# Altium PCB PCB1.PcbDoc (part 2 of 2)
Units mm, origin at the board's own origin, x right, y up, seen from the top; angles counter-clockwise.
Board outline 100 x 100 mm, 4 copper layers (Top Layer, Layer 1, Layer 2, Bottom Layer), stack 1.55 mm thick; 115 components, 62 nets, 404 pads, 430 vias.
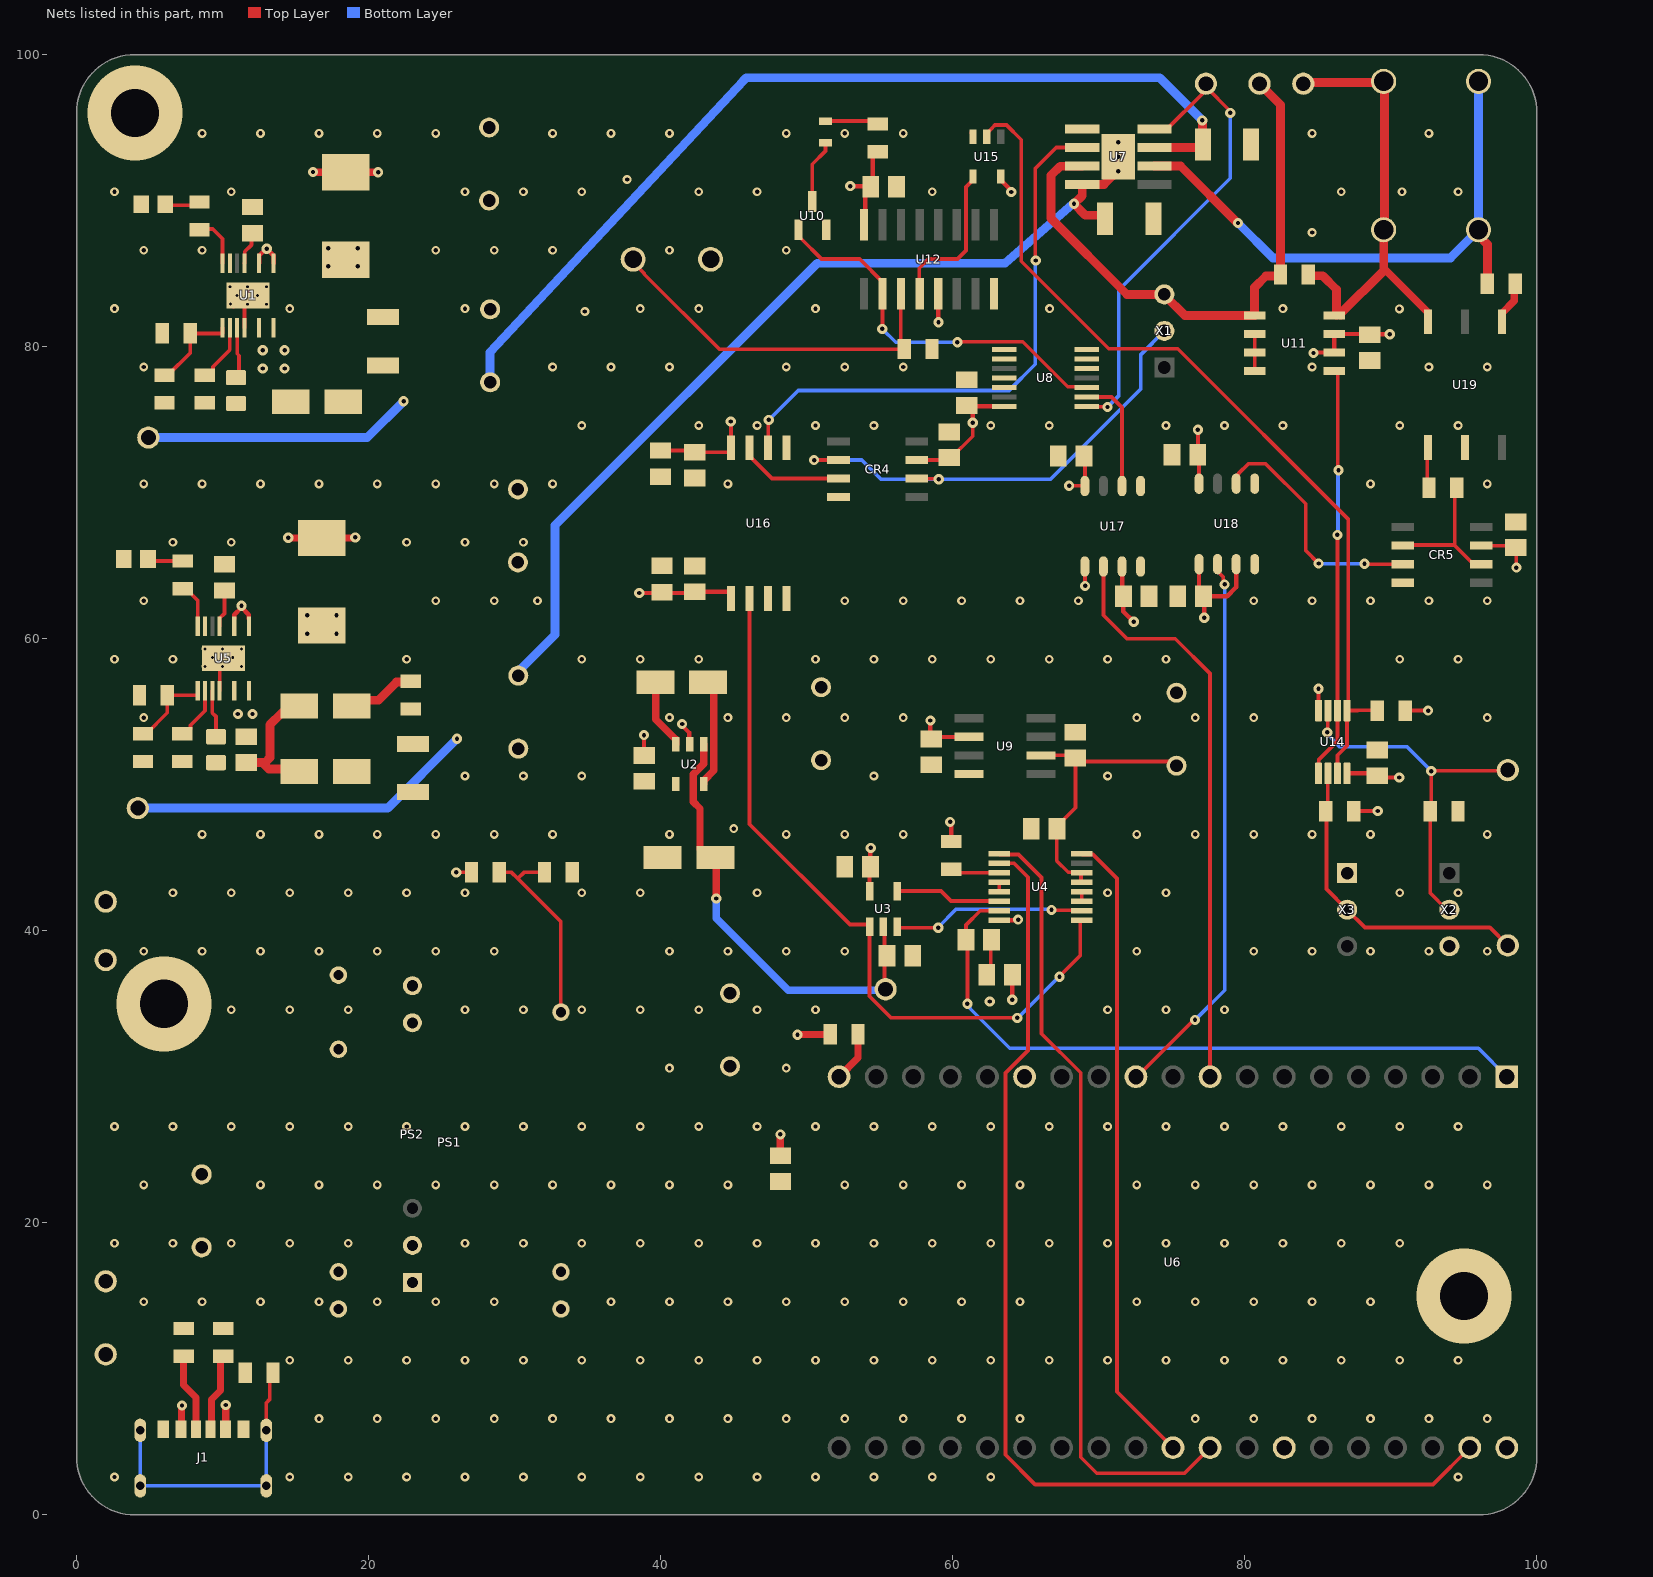
[diagram p4: the nets of this part, all layers, seen from the top]

## Part data
C1 C7 C10 C11 C17 C19 C23 C33: library part 450BXC10MEFC10X20, "No Description Available", Manufacturer_Name=Rubycon, Copyright="Copyright (C) 2026 Ultra Librarian. All rights reserved.", Manufacturer_Part_Number=450BXC10MEFC10X20
C2 C4 J1: Package=None, Availability=Unavailable, Price=None
  C2 C4: MF="{'manufacturer': u'W\xfcrth Elektronik'}", MP=865060640001
  J1: MP=USB4125-GF-A_REVA2
CR1 CR2 CR3: "No Description Available", Manufacturer_Name="SMC Diode Solutions", Copyright="Copyright (C) 2026 Ultra Librarian. All rights reserved.", Manufacturer_Part_Number=SK220ATR
CR4 CR5: "Output rail-to-rail op-amps", Manufacturer_Name=STMicroelectronics, Copyright="Copyright (C) 2026 Ultra Librarian. All rights reserved.", Datasheet=https://www.st.com/resource/en/datasheet/ts461.pdf, Manufacturer_Part_Number=TS461CDT, RefDes=RefDes, Type=Type
D4: "No Description Available", Manufacturer_Name="ROHM Semiconductor", Copyright="Copyright (C) 2026 Ultra Librarian. All rights reserved.", Manufacturer_Part_Number=SML-M13UTT86
PS1: "Power Supply", Manufacturer_Name="XP POWER", Mouser Part Number=209-JHM1005S05, Datasheet Link=https://docs.rs-online.com/50a4/0900766b8150c28f.pdf, Height=13.2mm, Manufacturer_Part_Number=JHM1005S05, Mouser Price/Stock=https://www.mouser.co.uk/ProductDetail/XP-Power/JHM1005S05?qs=w%2Fv1CP2dgqr7tGfLUXFVVQ%3D%3D
PS2: "Power Supply", Manufacturer_Name="XP POWER", Mouser Part Number=209-IMM0505S05, Datasheet Link=https://www.xppower.com/portals/0/pdfs/SF_IMM05.pdf, Height=13mm, Manufacturer_Part_Number=IMM0505S05, Mouser Price/Stock=https://www.mouser.co.uk/ProductDetail/XP-Power/IMM0505S05?qs=0lSvoLzn4L%2FxNlweCwWKNw%3D%3D
R8: library part Resistor, "Resistor", SimulationGenericComponent=True, TC1=0, TC2=0
U1 U5: library part LT8365HMSEPBF, "Low IQ Boost/SEPIC/Inverting Converter with 1.5A, 150V SwitchÂ", Manufacturer_Name="Analog Devices Inc", Copyright="Copyright (C) 2025 Ultra Librarian. All rights reserved.", Manufacturer_Part_Number=LT8365HMSE#PBF, RefDes=RefDes, Type="Power Management"
U2: "Switched-Capacitor Voltage Inverters", Manufacturer_Name="Analog Devices Inc", Copyright="Copyright (C) 2026 Ultra Librarian. All rights reserved.", Manufacturer_Part_Number=MAX870EUK+T, RefDes=RefDes, Type=Type
U3: "Zero-Drift, Single-Supply, Rail-to-Rail Input/Output Operational Amplifier", Manufacturer_Name="Analog Devices Inc", Copyright="Copyright (C) 2025 Ultra Librarian. All rights reserved.", Manufacturer_Part_Number=AD8628ARTZ-REEL7, RefDes=RefDes, Type=Type
U4: "2.7 V to 5.5 V, Serial-Input, Voltage-Output, 16-Bit nanoDACâ„¢ in 10-lead LFCSP, 16-lead 3 mm x 3 mm LFCSP, and 16-lead TSSOP", Manufacturer_Name="Analog Devices Inc", Copyright="Copyright (C) 2026 Ultra Librarian. All rights reserved.", Manufacturer_Part_Number=AD5542ABRUZ, RefDes=RefDes, Type=Type
U6: "The ESP32-DEVKITC-32UE evaluation board from Espressif Systems is designed for seamless wireless connectivity in IoT applications. Powered by the ESP32-WROOM-32UE module, it supports dual-mode BluetoothÂ® Smart Ready 4.x and 802.11 b/g/n Wi-Fi at 2.4GHz.", Package="CUSTOM-38 ESPRESSIF", Check_prices=https://www.snapeda.com/parts/ESP32-DEVKITC-32UE/Espressif+Systems/view-part/?ref=eda, MF="Espressif Systems", MP=ESP32-DEVKITC-32UE, SnapEDA_Link=https://www.snapeda.com/parts/ESP32-DEVKITC-32UE/Espressif+Systems/view-part/?ref=snap
U7: "180-V, wide bandwidth (6.5 MHz), high-slew rate (25 V/Âµs) unity-gain stable op amp 8-SO PowerPAD -40 to 85", Manufacturer_Name="Texas Instruments", Copyright="Copyright (C) 2026 Ultra Librarian. All rights reserved.", Manufacturer_Part_Number=OPA462IDDA, RefDes=RefDes, Type=TYPE
U8: "4-ch, 2-input, 2-V to 6-V 5.2 mA drive strength NOR gate 14-TSSOP -40 to 85", Manufacturer_Name="Texas Instruments", Copyright="Copyright (C) 2026 Ultra Librarian. All rights reserved.", Manufacturer_Part_Number=SN74HC02PWR, RefDes=RefDes, Type=Type
U9: "Ultraprecision, Low Noise, 2.500 V XFETÂ® Voltage References", Manufacturer_Name="Analog Devices Inc", Copyright="Copyright (C) 2026 Ultra Librarian. All rights reserved.", Manufacturer_Part_Number=ADR421ARZ, RefDes=RefDes, Type=Type
U10: "Description", Manufacturer_Name=onsemi, Copyright="Copyright (C) 2026 Ultra Librarian. All rights reserved.", Manufacturer_Part_Number=2N7002KT1G, RefDes=RefDes, Type=Type
U11: "-4 to 80V, bidirectional, ultra-precise current sense amplifier with enhanced PWM rejection 8-SOIC -40 to 125", Manufacturer_Name="Texas Instruments", Copyright="Copyright (C) 2025 Ultra Librarian. All rights reserved.", Manufacturer_Part_Number=INA240A1DR, RefDes=RefDes, Type=Type
U12: "CMOS Quad NOR R/S Latch with 3-State Outputs 16-SOIC -55 to 125", Manufacturer_Name="Texas Instruments", Copyright="Copyright (C) 2025 Ultra Librarian. All rights reserved.", Manufacturer_Part_Number=CD4043BDR, RefDes=RefDes, Type=Type
U13: "No Description Available", Manufacturer_Name="CW Industries", Copyright="Copyright (C) 2026 Ultra Librarian. All rights reserved.", Manufacturer_Part_Number=GPTS203211B, RefDes=RefDes, Type=Type
U14: "Dual high voltage, low power comparator", Package="VSSOP-8 Texas Instruments", Check_prices=https://www.snapeda.com/parts/TLV1702AIDGKR/Texas+Instruments/view-part/?ref=eda, MF="Texas Instruments", MP=TLV1702AIDGKR, SnapEDA_Link=https://www.snapeda.com/parts/TLV1702AIDGKR/Texas+Instruments/view-part/?ref=snap
U15: "Single 2-V to 5.5-V inverter 5-SOT-23 -40 to 125", Manufacturer_Name="Texas Instruments", Copyright="Copyright (C) 2026 Ultra Librarian. All rights reserved.", Manufacturer_Part_Number=SN74AHC1G04DBVR, RefDes=RefDes, Type=Type
U16: "Automotive, &plusmn;5-V input, precision voltage sensing reinforced isolated amplifier 8-SOIC -40 to 125", Manufacturer_Name="Texas Instruments", Copyright="Copyright (C) 2026 Ultra Librarian. All rights reserved.", Manufacturer_Part_Number=AMC1350QDWVRQ1, RefDes=RefDes, Type=Type
U17 U18: "Robust EMC, single-channel, reinforced digital isolator 8-SOIC -55 to 125", Manufacturer_Name="Texas Instruments", Copyright="Copyright (C) 2026 Ultra Librarian. All rights reserved.", Manufacturer_Part_Number=ISO7710FDR, RefDes=RefDes, Type=TYPE
U19: "No Description Available", Manufacturer_Name=Panasonic, Copyright="Copyright (C) 2026 Ultra Librarian. All rights reserved.", Manufacturer_Part_Number=AQV217AZ, RefDes=RefDes, Type=Type
X1 X2 X3: "No Description Available", Manufacturer_Name=Murata, Copyright="Copyright (C) 2026 Ultra Librarian. All rights reserved.", Manufacturer_Part_Number=PV36W102C01B00
C3 C5 C6 C8 C9 C12 C13 C14 C15 C16 C18 C20 C21 C22 C24 C25 C26 C27 C28 C29 C30 C31 C32 C34 C35 C36 C37 C38 C39 C40 C41 C42 C43 C44 L1 L2: SimulationGenericComponent=True
R1 R2 R3 R4 R5 R6 R7 R9 R10 R11 R12 R13 R14 R15 R16 R17 R18 R19 R20 R20_opt R21 R21_opt R22: SimulationGenericComponent=True, TC1=0, TC2=0

## Via types
v1: diameter 0.6, hole 0.3, Top Layer to Bottom Layer, tented both sides, 330 vias
v2: diameter 0.7, hole 0.3, Top Layer to Bottom Layer, tented both sides, 81 vias
v3: diameter 0.45, hole 0.2, Top Layer to Bottom Layer, tented both sides, 16 vias
v4: diameter 6.5, hole 3.3, Top Layer to Bottom Layer, tented both sides, 3 vias

## Nets (pads, with @x,y where several pads share a name; then routed paths per layer and width w, separated by ;. In a path a pad name is that pad's centre, name@x,y a point inside that pad or via, vN(x,y) a via of type N, cw(c..) or ccw(c..) an arc to the next point about the centre after c; other vN are vias at no path point)
+2.5: C10.1 C12.2 C21.2 U4.5 U4.6 U9.6 | length 20.1
  Top Layer w0.254: U9.6@66.042,52.011 68.217,52.011 C21.2@68.397,51.831 ; C12.2@67.122,46.992 67.122,44.788 67.904,44.005 68.789,44.005 U4.6@68.819,43.975 68.775,43.93 68.775,43.37 U4.5@68.819,43.325 ; C12.2@67.13,47 67.13,47.16 68.397,48.427 C21.2@68.397,51.831 ; C10.1@75.318,51.302 75.016,51.302 74.733,51.585 68.642,51.585 C21.2@68.397,51.831
  Bottom Layer w0.254: C10.1@75.113,51.302 C10.1@75.318,51.302
+3.3: C31.2 U4.15 U6.1 | length 47.2
  Top Layer w0.254: v2(61,35) 61,39.282 C31.2@60.899,39.383 60.899,40.4 61.874,41.375 U4.15@63.181,41.375
  Bottom Layer w0.254: v2(61,35) 61,34.879 61.193,34.686 61.193,34.668 63.905,31.956 95.987,31.956 U6.1@97.935,30.008
+5: C9.2 C19.1 C20.2 C22.1 C23.1 C30.2 C33.1 C34.2 C35.2 C36.1 C39.2 C41.2 J1.A9 J1.B9 PS1.22 PS1.23 PS2.1 R5.1 R22.2 TP+5.1 U2.2 U3.5 U4.16 U9.2 U16.1 U17.1 U17.3 U18.1 U18.3 | length 41.4
  Top Layer w0.3: v2(38.531,63.131) C35.2@40.028,63.131 ; v2(38.859,53.399) 38.859,52.026 C22.1@38.887,51.998 ; C35.2@40.085,63.188 C35.2@40.028,63.131 ; v2(41.465,54.163) 41.465,54.055 41.942,53.578 41.942,52.827 U2.2@41.988,52.78 ; C36.1@42.332,63.131 C35.2@40.028,63.131 ; C36.1@42.332,63.209 44.706,63.209 44.812,63.103 U16.1@44.812,62.763 ; U3.5@54.3,42.719 54.3,44.34 C30.2@54.36,44.4 54.36,45.649 v2(54.386,45.674) ; v2(58.466,54.396) 58.466,53.189 C20.2@58.523,53.132 58.658,53.267 U9.2@61.1,53.267 ; v2(59.817,47.458) 59.884,47.392 R5.1@59.884,46.113 ; U4.16@63.181,40.725 64.428,40.725 v2(64.472,40.768) ; v2(64.071,35.272) 64.071,36.991 C9.2@64.08,37 ; U17.1@69.045,64.941 69.052,64.935 69.052,63.622 v2(69.058,63.616) ; U17.3@71.585,64.941 71.614,64.913 71.614,62.973 C39.2@71.679,62.909 71.679,61.863 v2(72.385,61.156) ; U18.1@76.858,65.105 76.858,63.21 C41.2@77.16,62.909 ; v2(77.209,61.439) 77.209,62.859 C41.2@77.16,62.909 ; U18.3@79.398,65.105 79.398,63.52 78.787,62.909 C41.2@77.16,62.909
  Top Layer w0.5: J1.B9@7.16,5.88 7.19,5.91 7.19,7.47 v2(7.22,7.5) ; J1.A9@10.2,5.88 10.212,5.892 10.212,7.524 v2(10.224,7.535) ; v2(48.194,26.059) 48.194,24.605 C34.2@48.203,24.596 ; v2(49.364,32.886) 49.376,32.898 51.595,32.898 R22.2@51.607,32.91
+5_iso: C1.1 C11.1 C26.1 C27.2 C28.2 C29.2 C37.1 C38.2 C40.2 C42.2 C43.2 C44.2 CR4.7 CR5.7 L1.1 L2.1 PS1.14 PS2.9 R13.2 R15.2 R16.2 R20_opt.1 TP+5_iso.1 U1.1 U1.3 U5.1 U5.3 U8.14 U11.6 U11.7 U12.5 U12.16 U13.1 U14.8 U15.5 U16.8 U17.8 U18.8 X2.3 | length 66.2
  Top Layer w0.254: v2(26,44) R20_opt.1@27.047,44 ; C37.1@39.985,72.89 C38.2@42.332,72.89 ; C38.2@42.332,72.772 44.66,72.772 44.66,72.923 U16.8@44.812,73.076 44.812,74.864 v2(44.803,74.874) ; CR4.7@57.535,72.234 59.577,72.234 C43.2@59.741,72.398 59.901,72.398 61.37,73.866 v2(61.37,74.791) ; v2(67.965,70.473) 69.025,70.473 U17.8@69.045,70.453 69.045,72.444 C40.2@68.979,72.51 ; v2(76.784,74.313) 76.784,72.615 C42.2@76.768,72.599 76.858,72.508 U18.8@76.858,70.617 ; U11.7@86.113,80.866 88.497,80.866 C29.2@88.558,80.805 ; R15.2@90.975,55.059 90.994,55.078 v2(92.544,55.078) ; CR5.7@96.172,66.373 98.418,66.373 98.588,66.203 v2(98.588,64.87)
  Top Layer w0.3: U5.3@10.801,61.383 10.801,61.645 11.299,62.143 v2(11.299,62.251) 11.299,62.145 11.8,61.644 U5.1@11.8,61.383 ; U1.3@12.5,85.716 12.5,86.223 12.978,86.701 v2(13.022,86.701) ; v2@13.042,86.681 13.5,86.223 U1.1@13.5,85.716 ; v2(14.503,66.919) v2@14.524,66.897 ; v2(16.191,91.952) v2@16.2,91.943 ; v2@19.056,66.897 v2(19.093,66.934) ; v2@20.648,91.943 v2(20.65,91.941) ; v2(52.981,90.992) 54.256,90.992 C28.2@54.382,91.118 ; U12.16@53.923,88.342 53.997,88.416 53.997,90.573 C28.2@54.382,90.958 ; C28.2@54.524,91.1 54.524,93.028 54.832,93.335 R13.2@54.856,93.335 ; U12.5@59.003,83.617 59.003,81.694 v2(59.023,81.674) ; C26.1@60.925,75.963 60.975,75.912 U8.14@63.512,75.912 ; C26.1@60.968,75.976 60.506,75.976 60.4,75.871 61.05,75.871 61.37,75.551 v2(61.37,74.791) ; U15.5@63.282,91.638 63.282,91.405 64.006,90.682 v2(64.006,90.586) ; v2(84.698,79.561) 84.733,79.596 U11.6@86.113,79.596 U11.7@86.113,80.866 ; U14.8@86.99,50.778 88.914,50.778 89.194,50.498 v2(90.574,50.498) ; R16.2@87.452,48.195 87.463,48.206 v2(89.093,48.206) ; C29.2@88.558,80.805 88.601,80.849 v2(89.911,80.849)
  Top Layer w0.5: v2@14.524,66.897 L2.1@16.8,66.897 v2@19.056,66.897 ; v2@16.2,91.943 L1.1@18.44,91.943 v2@20.648,91.943
+90: C7.1 C8.2 C24.2 CR1.1 R3.2 TP+90.1 U7.7 | length 83.8
  Top Layer w0.6: U7.7@73.809,93.635 U7.7@73.809,93.635 76.794,93.634 77.009,93.849 C24.2@77.12,93.849 77.103,93.866 77.103,95.472 v2(77.086,95.489)
  Bottom Layer w0.6: TP+90.1@4.921,73.772 19.908,73.772 v2(22.398,76.261) ; C7.1@28.324,77.556 28.307,78.047 28.307,79.607 45.676,98.23 45.683,98.237 45.859,98.413 74.169,98.413 74.345,98.237 77.086,95.496 v2(77.086,95.489)
-5: C2.2 C32.2 TP-5.1 U2.1 U3.2 | length 31
  Top Layer w0.254: U3.2@55.25,40.281 55.325,40.206 55.325,36.075 TP-5.1@55.4,36
  Top Layer w0.508: U2.1@42.938,52.78 42.938,51.435 42.23,50.727 42.23,48.832 42.69,48.372 42.69,45.566 43.236,45.02 C2.2@43.736,45.02 ; C2.2@43.721,44.862 43.807,44.776 v2(43.807,42.21)
  Bottom Layer w0.508: v2(43.807,42.21) 43.807,40.853 48.736,35.923 55.323,35.923 TP-5.1@55.4,36
-90: C17.2 C18.2 C25.1 R8.1 R9.2 TP-90.1 U7.4 U7.9 | length 87.3
  Top Layer w0.6: C25.1@70.202,89 69.074,89 v2(68.299,89.775) 68.856,90.332 U7.4@68.856,91.095 68.867,91.106 70.357,91.106 70.932,91.681 70.932,91.75 71.182,92 v2(71.332,92) v2(71.332,93)
  Bottom Layer w0.6: TP-90.1@4.2,48.4 21.3,48.4 v2(26.05,53.15) ; C17.2@30.25,57.473 30.25,57.75 32.762,60.262 32.762,67.762 50.712,85.712 63.571,85.712 68.217,89.775 68.294,89.775 v2(68.299,89.775)
  other v2: 71.332,94
CLK: U4.9 U6.28 | length 54.4
  Top Layer w0.254: U4.9@63.181,45.275 63.231,45.224 64.5,45.224 66.078,43.646 66.078,32.951 68.753,30.276 68.753,3.956 69.849,2.86 75.867,2.86 U6.28@77.615,4.608
CS: U4.8 U6.29 | length 43.7
  Top Layer w0.254: U4.8@68.819,45.275 68.87,45.224 69.597,45.224 71.239,43.582 71.239,8.444 U6.29@75.075,4.608
DIN: U4.10 U6.21 | length 76.2
  Top Layer w0.254: U4.10@63.181,44.625 64.189,44.625 65.149,43.666 65.149,31.808 63.609,30.268 63.609,4.119 65.637,2.091 92.877,2.091 U6.21@95.395,4.608
"Electrode +": Post2.1 R21.1 U7.6 | length 39.6
  Top Layer w0.6: U7.6@73.809,92.365 75.596,92.365 v2@79.479,88.481 ; Post2.1@96,88 96,87.603 96.605,86.998 R21.1@96.605,84.313
  Bottom Layer w0.6: v2(79.526,88.462) 81.916,86.073 94.073,86.073 95.983,87.983 Post2.1@95.983,88 ; Post2.1@96,88 Post2.1@96,98.16
"Electrode -": E1_iso.1 R11.1 U7.3 U11.1 X1.3 | length 39.8
  Top Layer w0.6: U7.3@68.843,92.354 67.354,92.354 66.716,91.716 66.716,88.789 71.933,83.572 X1.3@74.485,83.572 74.485,83.531 75.88,82.136 U11.1@80.67,82.136 ; U11.1@80.666,82.136 80.666,84.058 81.442,84.835 82.335,84.835 R11.1@82.439,84.939 82.439,96.561 E1_iso.1@81,98
Electrode_charge_balancing: CR5.2 CR5.6 R20.2 | length 9.9
  Top Layer w0.254: CR5.2@90.812,66.373 90.858,66.419 94.346,66.419 ; 94.336,66.419 95.5,65.255 96.019,65.255 CR5.6@96.172,65.103 ; 94.374,66.391 94.374,70.208 R20.2@94.512,70.345
EN_OPA: U6.9 U17.2 | length 39.9
  Top Layer w0.254: U17.2@70.315,64.941 70.315,61.612 71.928,60 75.227,60 77.615,57.613 U6.9@77.615,30.008
EN_OPA2: U8.3 U10.1 U12.2 | length 26.4
  Top Layer w0.254: U10.1@49.427,88 49.427,87.568 49.58,87.416 49.593,87.416 51.009,86 53.623,86 55.193,84.43 U12.2@55.193,83.617 55.18,83.603 55.18,81.227 v2(55.166,81.213) ; v2(60.313,80.292) 60.348,80.328 64.797,80.328 67.871,77.254 68.985,77.254 U8.3@69.086,77.152
  Bottom Layer w0.254: v2(55.166,81.213) 56.087,80.292 v2(60.313,80.292)
EN_OPA_iso: U8.2 U17.6 | length 8.1
  Top Layer w0.254: U8.2@69.159,76.553 70.866,76.553 71.585,75.834 U17.6@71.585,70.453
Esp32_charge_balancing: U6.11 U18.2 | length 37.9
  Top Layer w0.254: U6.11@72.535,30.008 72.616,30.008 76.506,33.898 v2(76.587,33.898) ; U18.2@78.128,65.105 78.128,64.613 78.523,64.218 78.523,63.806 v2(78.608,63.72)
  Bottom Layer w0.254: v2(76.587,33.898) 78.615,35.926 78.615,63.714 v2(78.608,63.72)
GND: C2.1 C9.1 C10.2 C12.1 C19.2 C20.1 C21.1 C22.2 C23.2 C30.1 C31.1 C32.1 C33.2 C34.1 C35.1 C36.2 C39.1 C41.1 J1.A12 J1.B12 PS1.2 PS1.3 PS2.2 R12.2 R18.1 R19.1 TP_gnd.1 U2.4 U4.3 U4.4 U4.12 U4.13 U6.14 U6.20 U6.26 U9.4 U16.3 U16.4 U17.4 U18.4 | length 4.9
  Top Layer w0.254: J1.B12@5.93,5.88 J1.B12@6,5.95 ; J1.A12@11.43,5.88 J1.A12@11.5,5.95 ; R12.2@11.5,9.703 R12.2@11.548,9.75 ; C2.1@40.188,45.072 C2.1@40.236,45.12 ; C9.1@62.32,37 62.602,37.282 62.602,39.327 C31.1@62.659,39.383 ; U4.13@62.571,42.677 62.573,42.675 U4.13@63.181,42.675 U4.12@63.181,43.325 ; C12.1@65.363,46.993 C12.1@65.37,47 ; C21.1@68.397,53.591 C21.1@68.442,53.546 ; U4.3@68.819,42.025 U4.4@68.819,42.675
  Top Layer w0.508: C22.2@38.885,50.236 C22.2@38.904,50.217
  other v1: 2.6,2.6 14.6,2.6 18.6,2.6 22.6,2.6 26.6,2.6 30.6,2.6 34.6,2.6 38.6,2.6 42.6,2.6 46.6,2.6 50.6,2.6 54.6,2.6 58.6,2.6 62.6,2.6 94.6,2.6 16.6,6.6 20.6,6.6 24.6,6.6 28.6,6.6 32.6,6.6 36.6,6.6 40.6,6.6 44.6,6.6 48.6,6.6 52.6,6.6 56.6,6.6 60.6,6.6 64.6,6.6 76.6,6.6 80.6,6.6 84.6,6.6 88.6,6.6 92.6,6.6 96.6,6.6 14.6,10.6 18.6,10.6 22.6,10.6 26.6,10.6 30.6,10.6 34.6,10.6 38.6,10.6 42.6,10.6 46.6,10.6 50.6,10.6 54.6,10.6 58.6,10.6 62.6,10.6 66.6,10.6 70.6,10.6 74.6,10.6 78.6,10.6 82.6,10.6 86.6,10.6 90.6,10.6 94.6,10.6 4.6,14.6 8.6,14.6 12.6,14.6 16.6,14.6 20.6,14.6 24.6,14.6 28.6,14.6 36.6,14.6 40.6,14.6 44.6,14.6 48.6,14.6 52.6,14.6 56.6,14.6 60.6,14.6 64.6,14.6 72.6,14.6 76.6,14.6 80.6,14.6 84.6,14.6 88.6,14.6 2.6,18.6 6.6,18.6 10.6,18.6 14.6,18.6 18.6,18.6 26.6,18.6 30.6,18.6 34.6,18.6 38.6,18.6 42.6,18.6 46.6,18.6 50.6,18.6 54.6,18.6 58.6,18.6 62.6,18.6 66.6,18.6 70.6,18.6 74.6,18.6 78.6,18.6 82.6,18.6 86.6,18.6 90.6,18.6 4.6,22.6 12.6,22.6 16.6,22.6 20.6,22.6 24.6,22.6 28.6,22.6 32.6,22.6 36.6,22.6 40.6,22.6 44.6,22.6 52.6,22.6 56.6,22.6 60.6,22.6 64.6,22.6 72.6,22.6 76.6,22.6 80.6,22.6 84.6,22.6 88.6,22.6 92.6,22.6 96.6,22.6 2.6,26.6 6.6,26.6 10.6,26.6 14.6,26.6 18.6,26.6 22.6,26.6 26.6,26.6 30.6,26.6 34.6,26.6 38.6,26.6 42.6,26.6 46.6,26.6 50.6,26.6 54.6,26.6 58.6,26.6 62.6,26.6 66.6,26.6 70.6,26.6 74.6,26.6 78.6,26.6 82.6,26.6 86.6,26.6 90.6,26.6 94.6,26.6 40.6,30.6 48.6,30.6 38.6,34.6 42.6,34.6 46.6,34.6 50.6,34.6 70.6,34.6 74.6,34.6 78.6,34.6 40.6,38.6 44.6,38.6 48.6,38.6 52.6,38.6 72.6,38.6 80.6,38.6 38.6,42.6 46.6,42.6 70.6,42.6 74.6,42.6 40.6,46.6 48.6,46.6 52.6,46.6 56.6,46.6 72.6,46.6 76.6,46.6 80.6,46.6 45,47 54.6,50.6 70.6,50.6 40.603,54.603 44.6,54.6 48.6,54.6 52.6,54.6 56.6,54.6 72.6,54.6 76.6,54.6 80.6,54.6 38.6,58.6 42.6,58.6 50.6,58.6 54.6,58.6 58.6,58.6 62.6,58.6 66.6,58.6 70.6,58.6 74.6,58.6 52.6,62.6 56.6,62.6 60.6,62.6 64.6,62.6 68.6,62.6 80.6,62.6
  other v2: 62.535,35.16
  other v4: 95,15
GND_iso: C1.2 C3.2 C5.1 C6.1 C7.2 C8.1 C11.2 C13.2 C14.1 C15.1 C17.1 C18.1 C24.1 C25.2 C26.2 C27.1 C28.1 C29.1 C37.2 C38.1 C40.1 C42.1 C43.1 C44.1 CR3.1 CR4.4 CR5.4 PS1.16 PS2.8 R2.1 R4.2 R7.1 R10.2 R14.2 R17.1 R21_opt.2 TP_gnd_iso.1 U1.7 U1.12 U1.17 U5.7 U5.12 U5.17 U7.1 U8.5 U8.6 U8.7 U8.8 U8.9 U8.11 U8.12 U10.2 U11.2 U11.3 U11.4 U12.8 U14.4 U15.3 U16.5 U17.5 U18.5 U19.2 X3.1 | length 10.5
  Top Layer w0.254: U5.12@9.8,56.434 U5.17@9.8,58.4 ; U1.17@10.75,82.751 10.899,82.9 U1.17@11.5,82.9 ; U1.12@11.5,81.284 U1.17@11.5,82.9 ; U1.17@11.75,83.5 11.5,83.25 U1.17@11.5,83.1 ; C28.1@56.142,90.958 C28.1@56.29,90.81 ; R14.2@58.578,79.834 R14.2@58.625,79.787 ; U15.3@61.255,94.665 61.382,94.538 U15.3@61.382,94.362 ; U12.8@62.764,83.568 U12.8@62.813,83.617 ; U11.4@80.67,78.326 U11.3@80.67,79.596 U11.2@80.67,80.866 ; v2(85.038,56.576) 85.039,56.575 85.039,55.079 U14.4@85.04,55.078 ; C27.1@89.074,52.378 C27.1@89.194,52.498 ; U1.17@11.5,82.9 U1.17@11.5,83.1 ; U1.17@11.5,82.9 v3(11.7,82.9) U1.17@11.5,83.1
  other v1: 10.6,34.6 14.6,34.6 18.6,34.6 26.6,34.6 30.6,34.6 34.6,34.6 4.6,38.6 8.6,38.6 12.6,38.6 16.6,38.6 20.6,38.6 24.6,38.6 28.6,38.6 84.6,38.6 88.6,38.6 92.6,38.6 96.6,38.6 6.6,42.6 10.6,42.6 14.6,42.6 18.6,42.6 22.6,42.6 26.6,42.6 34.6,42.6 90.6,42.6 94.6,42.6 8.6,46.6 12.6,46.6 16.6,46.6 20.6,46.6 24.6,46.6 28.6,46.6 32.6,46.6 84.6,46.6 88.6,46.6 96.6,46.6 26.6,50.6 30.6,50.6 34.6,50.6 4.6,54.6 96.6,54.6 2.6,58.6 6.6,58.6 22.6,58.6 34.6,58.6 90.6,58.6 94.6,58.6 4.6,62.6 24.6,62.6 28.6,62.6 31.562,62.6 84.6,62.6 88.6,62.6 92.6,62.6 96.6,62.6 6.6,66.6 10.6,66.6 22.6,66.6 26.6,66.6 30.6,66.6 4.6,70.6 8.6,70.6 12.6,70.6 16.6,70.6 20.6,70.6 24.6,70.6 28.6,70.6 32.6,70.6 44.6,70.6 88.6,70.6 96.6,70.6 34.6,74.6 42.6,74.6 46.6,74.6 50.6,74.6 54.6,74.6 62.6,74.6 66.6,74.6 74.6,74.6 78.6,74.6 82.6,74.6 90.6,74.6 94.6,74.6 4.6,78.6 32.6,78.6 36.6,78.6 40.6,78.6 48.6,78.6 52.6,78.6 56.6,78.6 84.6,78.6 92.6,78.6 96.6,78.6 34.811,82.404 90.581,82.581 2.6,82.6 14.6,82.6 26.6,82.6 38.6,82.6 42.6,82.6 50.6,82.6 66.627,82.6 82.6,82.6 4.6,86.6 8.6,86.6 24.6,86.6 28.6,86.6 32.6,86.6 40.6,86.6 48.6,86.6 84.6,87.811 2.6,90.6 10.6,90.6 26.6,90.6 30.6,90.6 34.6,90.6 42.6,90.6 46.6,90.6 58.6,90.6 86.6,90.6 90.759,90.6 94.6,90.6 37.701,91.439 8.6,94.6 12.6,94.6 16.6,94.6 20.6,94.6 24.6,94.6 32.6,94.6 36.6,94.6 40.6,94.6 48.6,94.6 52.6,94.6 56.6,94.6 84.6,94.6 92.6,94.6
  other v3: 8.8,58.1 10,58.1 11.3,58.1 9.3,58.7 10.7,58.7 8.8,59.3 10,59.3 11.3,59.3 13,82.9 10.536,82.922 11,83.5 12.4,83.5 10.5,84.1 11.7,84.1 13,84.1
  other v4: 6,35 4,96
INV: U3.4 U4.14 | length 7.2
  Top Layer w0.254: U3.4@56.2,42.719 59.191,42.719 59.868,42.042 U4.14@63.164,42.042
NetC3_1: C3.1 U1.5 | length 2.3
  Top Layer w0.254: U1.5@11.5,85.716 11.513,85.729 11.513,86.502 11.976,86.965 11.976,87.67 C3.1@12.062,87.756
NetC4_1: C4.1 U2.5 | length 7.4
  Top Layer w0.508: U2.5@42.938,50.05 42.938,50.285 43.646,50.993 43.646,56.63 C4.1@43.247,57.028
NetC4_2: C4.2 U2.3 | length 4.8
  Top Layer w0.508: C4.2@39.647,57.028 39.647,54.492 41.038,53.101 U2.3@41.038,52.78
NetC5_2: C5.2 U1.11 | length 3.5
  Top Layer w0.254: C5.2@10.922,77.88 11.126,78.084 11.126,79.378 11,79.503 U1.11@11,81.284
NetC6_2: C6.2 R1.1 | length 2.5
  Top Layer w0.254: C6.2@6.075,89.75 6.156,89.67 8.193,89.67 R1.1@8.422,89.899
NetC13_1: C13.1 U5.5 | length 2.6
  Top Layer w0.254: U5.5@9.8,60.866 9.8,61.393 10.13,61.723 C13.1@10.13,63.305
NetC14_2: C14.2 U5.11 | length 3.2
  Top Layer w0.254: U5.11@9.3,56.434 9.3,54.921 9.55,54.671 C14.2@9.55,53.288
NetC15_2: C15.2 R6.1 | length 2.4
  Top Layer w0.254: C15.2@4.894,65.449 5.022,65.321 R6.1@7.267,65.321
NetC16_1: C16.1 CR2.1 CR3.2 | length 9.4
  Top Layer w0.6: C16.1@11.607,51.526 12.922,51.526 ; CR3.2@15.247,50.9 15.071,51.076 13.164,51.076 12.818,51.422 12.922,51.526 ; CR2.1@15.247,55.4 14.797,54.95 14.081,54.95 13.242,54.111 13.242,51.846 12.922,51.526
NetC16_2: C16.2 L2.2 U5.14 U5.16
  other v2: 11.051,54.848 12.051,54.848 15.801,60.348 17.801,60.348 15.801,61.598 17.801,61.598
NetCR1_2: CR1.2 L1.2 U1.14 U1.16
  other v2: 12.75,78.5 14.25,78.5 12.75,79.75 14.25,79.75 17.25,85.5 19.25,85.5 17.25,86.742 19.25,86.742
NetCR2_2: CR2.2 R9.1 | length 4.7
  Top Layer w0.6: CR2.2@18.853,55.4 19.24,55.786 20.673,55.786 21.919,57.032 22.778,57.032 R9.1@22.859,57.113
NetCR4_3: CR4.3 U16.7 | length 7.3
  Top Layer w0.254: U16.7@46.082,73.076 46.082,72.504 47.623,70.964 CR4.3@52.176,70.964
NetCR5_3: CR5.3 U18.6 | length 17
  Top Layer w0.254: U18.6@79.398,70.617 79.398,71.109 79.566,71.277 79.566,71.303 80.233,71.971 81.425,71.971 84.161,69.234 84.161,66.038 v2(85.048,65.152) ; v2(88.193,65.129) 88.219,65.103 CR5.3@90.812,65.103
  Bottom Layer w0.254: v2(85.048,65.152) 85.059,65.14 88.181,65.14 v2(88.193,65.129)
NetD4_1: D4.1 U10.3 | length 4.4
  Top Layer w0.254: U10.3@50.375,89.935 50.375,92.484 51.281,93.39 D4.1@51.281,93.945
NetD4_2: D4.2 R13.1 | length 3.7
  Top Layer w0.254: D4.2@51.281,95.443 54.653,95.443 R13.1@54.856,95.24
NetE2_iso_1: E2_iso.1 Post1.1 R11.2 U11.8 U19.6 | length 31.9
  Top Layer w0.5: 89.5,85.358 92.516,82.342 92.516,81.721 U19.6@92.533,81.704
  Top Layer w0.6: E2_iso.1@84,98 84.08,98.08 89.42,98.08 Post1.1@89.5,98.16 89.559,98.101 89.559,88.059 Post1.1@89.5,88 89.5,85.358 89.5,85.203 86.54,82.243 U11.8@86.54,82.157 ; R11.2@84.344,84.939 84.433,84.849 85.33,84.849 86.268,83.911 U11.8@86.268,82.157
NetEN_1: EN.1 U7.8 U8.1 | length 32.8
  Top Layer w0.254: U8.1@69.159,75.903 69.178,75.885 70.577,75.885 v2(70.595,75.867) ; U7.8@73.809,94.905 74.674,94.905 77.089,97.32 77.089,97.757 EN.1@77.332,98 77.332,97.788 79,96.121 v2(79,96)
  Bottom Layer w0.254: v2(70.595,75.867) 71.372,76.643 71.372,83.895 79,91.524 v2(79,96)
NetJ1_A5: J1.A5 R18.2 | length 5.3
  Top Layer w0.5: R18.2@7.325,10.832 7.325,8.902 8.18,8.047 J1.A5@8.18,5.88
NetJ1_B5: J1.B5 R19.2 | length 5.3
  Top Layer w0.5: J1.B5@9.18,5.88 9.239,5.939 9.239,7.913 9.854,8.528 9.854,10.657 R19.2@10.058,10.862
NetJ1_S1: J1.S1 J1.S2 J1.S3 J1.S4 R12.1 | length 20.4
  Top Layer w0.254: J1.S2@13,5.8 13,7.679 13.224,7.902 13.224,9.521 R12.1@13.453,9.75
  Bottom Layer w0.254: J1.S1@4.36,5.8 J1.S3@4.36,2 J1.S4@13,2 J1.S2@13,5.8
NetR1_2: R1.2 U1.8 | length 3.5
  Top Layer w0.254: R1.2@8.422,87.994 8.476,88.047 9.33,88.047 10,87.377 U1.8@10,85.716
NetR2_2: R2.2 U1.10 | length 4.1
  Top Layer w0.254: R2.2@8.774,78.05 9.015,78.05 9.345,78.38 9.345,78.621 10.5,79.776 U1.10@10.5,81.284
NetR3_1: R3.1 R4.1 U1.9 | length 6.3
  Top Layer w0.254: R3.1@6.028,78.05 6.269,78.05 7.782,79.563 R4.1@7.782,80.903 9.987,80.903 10,80.916 U1.9@10,81.284
NetR5_2: R5.2 U4.11 | length 3.4
  Top Layer w0.254: R5.2@59.884,44.208 60.116,43.975 U4.11@63.181,43.975
NetR6_2: R6.2 U5.8 | length 3.1
  Top Layer w0.254: R6.2@7.267,63.416 7.508,63.416 8.3,62.624 U5.8@8.3,60.866
NetR7_2: R7.2 U5.10 | length 3.7
  Top Layer w0.254: R7.2@7.236,53.498 7.477,53.498 7.807,53.829 7.807,54.07 8.8,55.063 U5.10@8.8,56.434
NetR8_2: R8.2 R10.1 U5.9 | length 5.8
  Top Layer w0.254: R8.2@4.551,53.498 4.792,53.498 6.219,54.926 R10.1@6.219,56.135 8.287,56.135 8.3,56.148 U5.9@8.3,56.434
NetR14_1: R14.1 U12.3 U13.6 | length 25.2
  Top Layer w0.254: U13.6@38.114,85.979 38.114,85.765 38.878,85.001 38.878,84.955 44.02,79.813 56.651,79.813 R14.1@56.673,79.834 56.427,80.08 56.427,83.581 U12.3@56.463,83.617
NetR15_1: R15.1 U14.1 U14.7 U15.2 | length 61
  Top Layer w0.254: U15.2@62.332,94.362 62.332,94.595 62.701,94.964 62.701,94.984 62.893,95.176 63.672,95.176 64.683,94.165 64.683,85.841 70.676,79.847 75.4,79.847 87.086,68.161 87.086,55.174 U14.1@86.999,55.087 ; U14.7@86.34,50.778 86.34,52.023 86.99,52.673 U14.1@86.99,54.53 ; U14.1@86.99,54.643 U14.1@86.99,55.078 U14.1@86.999,55.087 ; R15.1@89.07,55.059 89.03,55.098 87.726,55.098 87.714,55.087 U14.1@86.999,55.087
NetR20_1: R20.1 U19.1 | length 2.8
  Top Layer w0.254: U19.1@92.533,73.094 92.496,73.056 92.496,70.457 R20.1@92.607,70.345
NetR21_2: R21.2 U19.4 | length 3
  Top Layer w0.5: U19.4@97.613,81.704 97.613,82.305 98.451,83.143 98.451,84.254 R21.2@98.51,84.313
NetR22_1: R22.1 U6.19 | length 3.4
  Top Layer w0.5: U6.19@52.215,30.008 53.512,31.305 R22.1@53.512,32.91
NetU3_3: U3.3 U4.2 | length 13.2
  Top Layer w0.254: U3.3@56.2,40.281 56.269,40.212 v2(59.002,40.212) ; v2(66.755,41.428) 66.781,41.402 68.793,41.402 U4.2@68.819,41.375
  Bottom Layer w0.254: v2(59.002,40.212) 59.002,40.248 60.225,41.471 66.712,41.471 v2(66.755,41.428)
NetU11_5: U11.5 U14.2 U14.5 | length 28.4
  Top Layer w0.254: U14.5@84.938,50.676 U14.5@85.04,50.778 85.066,50.804 85.066,51.723 86.34,52.998 U14.2@86.34,55.078 86.336,55.082 86.336,67.105 v2(86.332,67.109) ; U11.5@86.113,78.326 86.212,78.326 86.364,78.174 86.364,71.569 v2(86.406,71.528)
  Bottom Layer w0.254: v2(86.332,67.109) 86.369,67.146 86.369,71.49 v2(86.406,71.528)
NetU12_4: U12.4 U15.4 | length 10.7
  Top Layer w0.254: U12.4@57.733,83.617 57.697,83.653 57.697,85.365 58.332,86 60.325,86 60.91,86.585 60.91,90.933 61.382,91.405 U15.4@61.382,91.638
S1: U3.1 U4.1 U16.2 | length 50.7
  Top Layer w0.254: U16.2@46.082,62.763 46.082,47.298 52.954,40.426 54.249,40.426 54.3,40.376 54.3,35.521 55.784,34.037 v2(64.408,34.037) ; v2(67.303,36.858) 67.303,36.887 68.736,38.32 68.736,40.674 68.769,40.674 U4.1@68.819,40.725
  Bottom Layer w0.254: v2(64.408,34.037) 64.442,34.037 67.263,36.858 v2(67.303,36.858)
S1_iso+: CR4.2 CR4.6 X1.2 | length 33.3
  Top Layer w0.254: v2(50.503,72.23) 50.506,72.234 CR4.2@52.176,72.234 ; CR4.6@57.535,70.964 57.556,70.944 59.018,70.944 v2(59.038,70.923)
  Bottom Layer w0.254: v2(50.503,72.23) 53.77,72.23 55.077,70.923 66.693,70.923 72.878,77.108 72.878,79.465 X1.2@74.485,81.072
S1_iso-: U7.2 U16.6 | length 39
  Top Layer w0.254: U16.6@47.352,73.076 47.372,73.095 47.372,74.96 v2(47.391,74.979) ; v2(65.683,85.899) 65.646,85.936 65.646,92.193 67.088,93.635 U7.2@68.856,93.635
  Bottom Layer w0.254: v2(47.391,74.979) 49.412,77 63.85,77 65.641,78.791 65.641,85.857 v2(65.683,85.899)
TRIM: PS1.10 R20_opt.2 R21_opt.1 | length 13.8
  Top Layer w0.254: R20_opt.2@28.952,44 29.791,44 30.215,43.576 30.64,44 R21_opt.1@32.048,44 ; 30.219,43.58 33.157,40.642 PS1.10@33.157,34.443
V_th+: R17.2 U14.3 V_th+.1 X2.2 | length 25.4
  Top Layer w0.254: v2(85.637,53.583) 85.663,53.61 85.663,55.051 U14.3@85.69,55.078 ; R17.2@92.686,48.195 92.686,42.58 93.821,41.445 X2.2@94.124,41.445 ; R17.2@92.687,48.195 92.757,48.265 v2(92.757,50.933) 92.791,50.967 97.967,50.967 V_th+.1@98,51
  Bottom Layer w0.254: v2(85.637,53.583) 85.637,53.474 86.099,53.012 86.099,52.988 86.475,52.612 91.079,52.612 v2(92.757,50.933)
V_th-: R16.1 U14.6 V_th-.1 X3.2 | length 22
  Top Layer w0.254: U14.6@85.69,50.778 85.668,50.756 85.668,48.229 85.591,48.152 85.591,42.854 X3.2@87,41.445 88.218,40.227 96.773,40.227 V_th-.1@98,39
pads on no net: CR4.1 CR4.5 CR4.8 CR5.1 CR5.5 CR5.8 PS2.3 U1.6 U4.7 U5.6 U6.2 U6.3 U6.4 U6.5 U6.6 U6.7 U6.8 U6.10 U6.12 U6.13 U6.15 U6.16 U6.17 U6.18 U6.22 U6.23 U6.24 U6.25 U6.27 U6.30 U6.31 U6.32 U6.33 U6.34 U6.35 U6.36 U6.37 U6.38 U7.5 U8.4 U8.10 U8.13 U9.1 U9.3 U9.5 U9.7 U9.8 U12.1 U12.6 U12.7 U12.9 U12.10 U12.11 U12.12 U12.13 U12.14 U12.15 U15.1 U17.7 U18.7 U19.3 U19.5 X1.1 X2.1 X3.3

## Polygon pours and split planes (outlines as drawn)
GND on Bottom Layer "NONET_L04_P018" (solid, shelved, pour order 18): 38,28 0,28 0,4 4,0 96,0 100,4 100,32 81,32 81,66 38,66
GND_iso on Bottom Layer "NONET_L-01_P-001" (solid, shelved, pour order 21): 0,96 0,31 35,31 35,69 84,69 84,35 100,35 100,96 96,100 4,100
-90 on Bottom Layer "NONET_L04_P007" (solid, shelved, pour order 7): 61,98 61,87 81,87 81,98
NetC16_2 on Bottom Layer "NONET_L04_P005" (solid, shelved, pour order 5): 15.3,62.4 15.3,56.782 13.937,55.741 15.3,55.741 10.3,55.741 10.3,53.914 18.8,53.914 18.8,58.9 18.8,62.4
NetCR1_2 on Bottom Layer "NONET_L04_P006" (solid, shelved, pour order 6): 16.75,87.5 16.75,81.673 15.245,80.487 12,80.487 12,77.5 14.5,77.5 20,77.5 20,83 20,87.5
GND on Top Layer "NONET_L01_P019" (solid, shelved, pour order 19): 0,28 0,4 4,0 96,0 100,4 100,32 80.929,32 80.929,66 38,66 38,28
GND_iso on Top Layer "NONET_L-01_P-001" (solid, shelved, pour order 24): -0.042,31 34.958,31 34.958,69 84,69 84,68.792 84,69 84,35 99.958,35 99.958,96 95.958,100 3.958,100 -0.042,96
GND_iso on Top Layer "NONET_L01_P008" (solid, shelved, pour order 8): 11.3,68.65 0.8,68.65 0.8,44.15 25.35,44.15 33.3,52.1 33.3,54 30.15,54 27.05,50.9 21.05,50.9 20.8,51.15 17.05,51.15 10.05,51.15 10.05,51.9 6.8,51.9 6.8,45.65 1.55,45.65 1.55,52.4 5.05,52.4 5.05,57.4 11.55,57.4 11.55,59.9 11.3,59.9 11.3,64.15
-90 on Top Layer "NONET_L01_P009" (solid, shelved, pour order 9): 2.3,52.15 6.05,52.15 6.05,46.4 2.3,46.4
NetC16_2 on Top Layer "NONET_L01_P016" (solid, shelved, pour order 16): 10.55,57.1 10.55,52.393 12.793,52.393 12.8,52.4 12.791,52.409 12.791,57.107
-90 on Top Layer "NONET_L01_P017" (solid, shelved, pour order 17): 21.3,55.9 24.476,55.9 26.8,59.4 33.3,59.4 33.3,54.5 30.081,54.5 27.261,51.65 21.3,51.65
GND_iso on Top Layer "NONET_L01_P011" (solid, shelved, pour order 11): 12.975,89 12.975,92 1.75,92 1.75,69.5 11.75,69.5 11.75,76.5 7.25,76.5 7.25,73.5 6.75,73.5 6.75,79.5 6.75,81.5 6.75,82.5 14.25,82.5 14.25,81 30.25,81 30.25,84.5 15.25,84.5 12.975,84.5
NetCR1_2 on Top Layer "NONET_L01_P015" (solid, shelved, pour order 15): 12.25,82 12.25,74.5 14.75,74.5 14.75,82
+90 on Top Layer "NONET_L01_P012" (solid, shelved, pour order 12): 29.75,80 29.75,74 16.75,74 16.75,80
+90 on Top Layer "NONET_L01_P010" (solid, shelved, pour order 10): 6.75,76.5 6.75,72.5 3.25,72.5 3.25,76.5
GND on Layer 1 "NONET_L02_P000" (solid, shelved, pour order 0): 81,32 81,66 38,66 38,28 0,28 0,4 4,0 96,0 100,4 100,32
GND_iso on Layer 1 "NONET_L-01_P-001" (solid, shelved, pour order 23): 0,31 35,31 35,69 84,69 84,35 100,35 100,96 96,100 4,100 0,96
+5 on Layer 2 "NONET_L03_P020" (solid, shelved, pour order 20): 81,31.984 81,66 38,66 38,28 0,28 0,4 4,0 96,0 100,4 100,31.984
+5_iso on Layer 2 "NONET_L-01_P-001" (solid, shelved, pour order 22): 0,31 35,31 35,69 84,69 84,35 100,35 100,96 96,100 4,100 0,96

## Keep-outs
Keep-Out Layer:
  the board outline again, w0.254

## Other copper
Top Layer:
  pour cut-out: 7.706,55.933 7.693,55.92 6.75,55.92 6.75,55.41 6.763,55.396 6.685,55.318 6.436,55.318 6.436,54.807 5.363,53.734 5.363,52.687 5.35,52.674 5.494,52.53 6.436,52.53 6.436,53.956 6.528,54.048 7.562,54.048 7.562,54.14 8.583,55.161 8.517,55.226 8.517,55.619 8.151,55.619 8.072,55.698 8.072,55.881
  pour cut-out: 8.974,54.892 8.909,54.892 8.015,53.998 8.015,51.991 8.767,51.991 8.963,52.187 10.294,52.187 10.294,52.569 10.403,52.678 10.403,54.172
  pour cut-out: 13.948,54.116 20.958,54.116 20.995,54.152 21.079,54.067 21.079,51.229 20.485,51.229 20.243,51.472 20.243,51.884 13.916,51.884 13.9,51.9
  pour cut-out: 12.84,65.789 12.348,65.297 12.26,65.297 12.26,60.843 11.7,60.283 11.7,57.92 12.373,57.246 12.866,57.246 12.866,57.12 13.572,56.413 13.648,56.489 20.677,56.489 22.153,57.965 22,58.118 22,66.207 21.774,66.433 18.557,66.433 18.557,65.12 18.443,65.007 18.304,65.146 13.787,65.146
  pour cut-out: 29.387,80.87 29.517,81 30.45,81 30.45,79.025 30.351,78.927 30.006,79.272 30.006,80.165
  pour cut-out: 14.373,90.675 13.95,90.252 13.95,85.623 13.97,85.603 13.759,85.391 13.759,84.626 13.789,84.596 16.396,84.596 16.396,87.082 14.705,88.773 14.705,90.433 14.594,90.433 14.383,90.644
  pour cut-out: 8.361,80.684 8.361,80.145 8.295,80.079 8.278,80.096 8.058,80.096 8.058,79.519 6.805,78.265 6.805,77.15 6.904,77.051 7.157,77.051 7.157,76.682 7.234,76.605 7.932,76.605 7.932,78.491 8.031,78.59 9.075,78.59 9.075,78.727 10.295,79.947 10.295,80.524 9.746,80.524 9.74,80.519 9.724,80.535 9.724,80.684
  pour cut-out: 15.144,80.876 15.144,77.549 15.195,77.498 16.568,77.498 16.568,80.23 16.982,80.644 17.076,80.644 17.076,80.862 17.04,80.898
  pour cut-out: 6.884,82.403 6.877,82.396 6.877,81.758 8.232,81.758 8.362,81.628 8.362,81.101 9.801,81.101 9.814,81.087 9.814,82.357

## Silkscreen, mask and mechanical layers (free items; w line width, h text height)
Top Overlay:
  drawing of 30 lines, arcs and shapes, not listed
  text "Galvanic isolation" at 41,77 h0.6
  text "Alimentez le circuit avec une batterie externe pour cellulaire." at 16,3 h1
Bottom Overlay:
  drawing of 28 lines, arcs and shapes, not listed
  text "Jeremie Beaupre" at 40.746,25.762 h1.52
  text "2026 - Electrostimulator V1" at 49.378,22.736 h1.52

## Text inside footprints (layer, text, board x,y; h text height)
C2: Top Overlay "+" at 39.036,47.12 h1.02 r180; Mechanical 13 "+" at 39.036,47.12 h1.02 r180
C4: Top Overlay "+" at 44.347,54.928 h1.02
CR4: Top Overlay "*" at 51.605,73.936 h1.27; Mechanical 13 "*" at 51.605,73.936 h1.27
CR5: Top Overlay "*" at 90.241,68.075 h1.27; Mechanical 13 "*" at 90.241,68.075 h1.27
U1: Top Overlay "*" at 14.158,84.576 h1 r270; Mechanical 13 "*" at 12.448,84.986 h1.27 r270
U2: Top Overlay "*" at 43.533,53.542 h1 r270; Mechanical 13 "*" at 42.354,52.355 h1.27 r270
U3: Top Overlay "*" at 53.4,39.9 h1 r90; Mechanical 13 "*" at 54.884,40.586 h1.27 r90
U4: Top Overlay "*" at 69.683,40.096 h1 r180; Mechanical 13 "*" at 68.184,41.794 h1.27 r180
U5: Top Overlay "*" at 12.74,59.429 h1 r270; Mechanical 13 "*" at 10.749,60.136 h1.27 r270
U8: Top Overlay "*" at 69.731,75.674 h1 r180
U9: Top Overlay "*" at 60.399,55.071 h1; Mechanical 13 "*" at 61.648,53.802 h1.27
U11: Top Overlay "*" at 80.098,82.567 h1; Mechanical 13 "*" at 81.461,81.387 h1.27
U12: Top Overlay "*" at 53.492,83.046 h1 r90
U15: Top Overlay "*" at 63.797,95.047 h1 r270; Mechanical 13 "*" at 62.698,93.94 h1.27 r270
U16: Top Overlay "*" at 44.285,62.875 h1 r90; Mechanical 13 "*" at 45.092,64.186 h1.27 r90
U19: Top Overlay "*" at 92.127,72.522 h1.27 r90